# Altium PCB EVAL-CN0349-PMDZ-AltiumDesignerLayout-Rev0.PcbDoc
Units mil, origin at the board's own origin, x right, y up, seen from the top; angles counter-clockwise.
Board outline 2612 x 800 mil, 2 copper layers (Top Layer, Bottom Layer); 49 components, 27 nets, 165 pads, 39 vias.
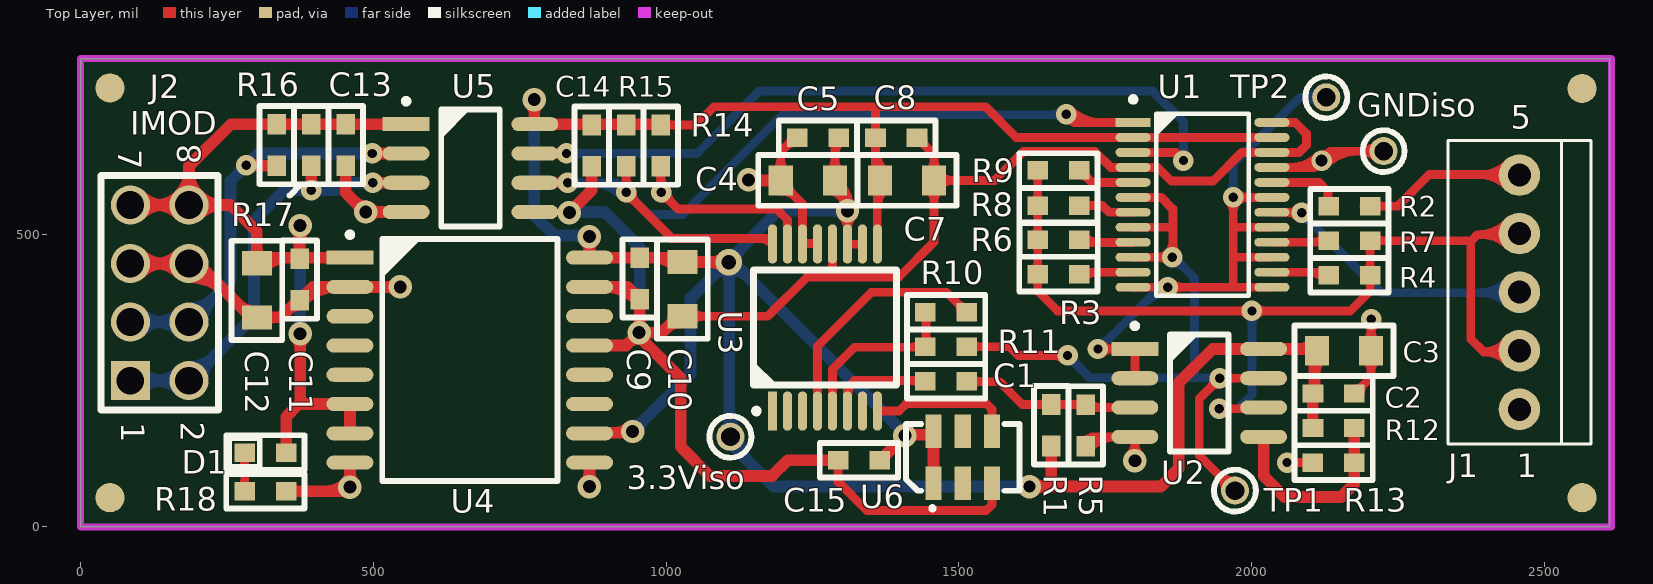
[diagram p0: Top Layer view]
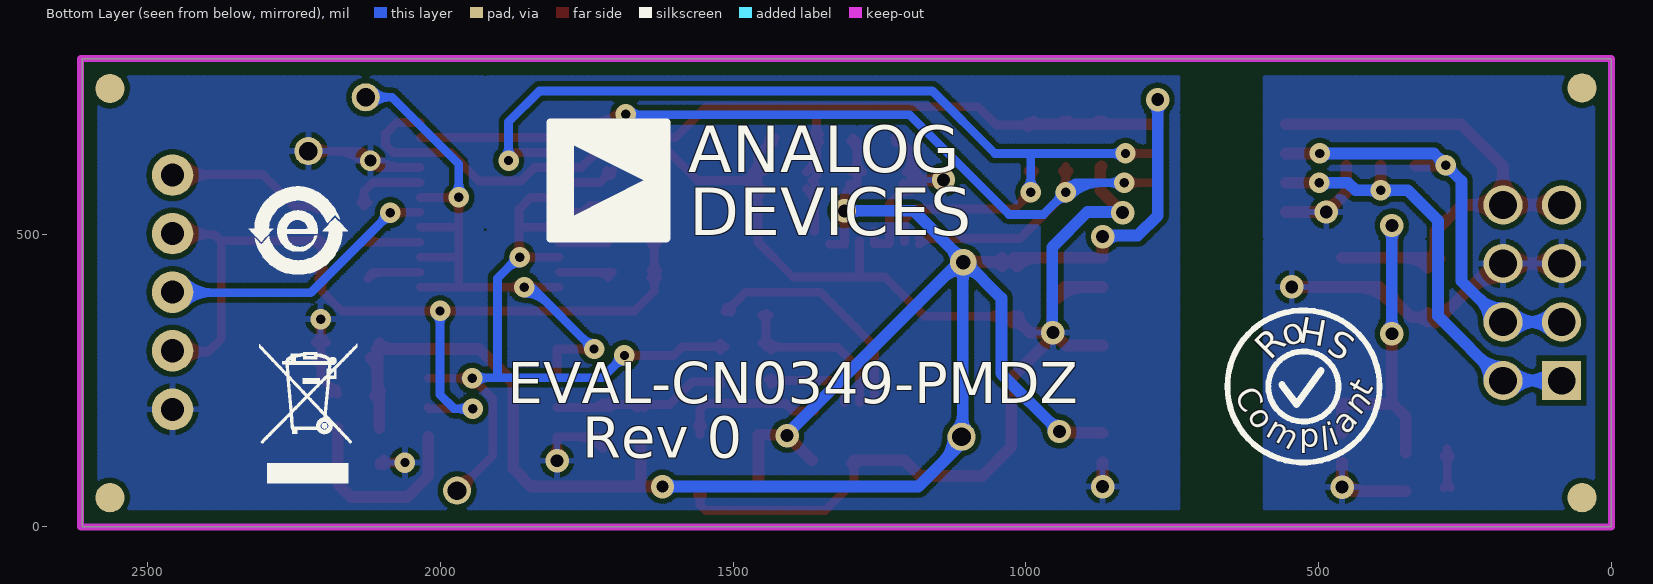
[diagram p1: Bottom Layer view, seen from below]

## Layer stack, top to bottom
Top Layer: signal copper 1.4
Dielectric: dielectric 12.6, FR-4, Dk 4.8
Bottom Layer: signal copper 1.4

## Board outline
0,0 2612,0 2612,800 0,800

## Design rules (kind name [scope] priority, off if disabled: settings)
Clearance [All] p1: gap=9
ComponentClearance [All] p1 off: gap=10 collisioncheckmode=3 verticalgap=10 showdistances=FALSE
PolygonConnect [All] p1: connectstyle=Relief reliefconductorwidth=10 reliefentries=4 polygonreliefangle="90 Angle"
RoutingVias [All] p1: holewidth=16 width=35 viastyle="Through Hole" minholewidth=16 minwidth=35 maxholewidth=60 maxwidth=60
SilkscreenOverComponentPads [All] p1: minsilkscreentomaskgap=10
SolderMaskExpansion [All] p1: expansion=4
Width [All] p1: maxlimit=60 minlimit=10 preferedwidth=20 minimp=50.000000 maximp=50.000000 favimp=50.000000
26 further rules are at their usual default settings.

## Classes and differential pairs
component class CN0349: 3.3Viso C1 C2 C3 C4 C5 C7 C8 C9 C10 C11 C12 C13 C14 C15 D1 GNDiso J1 J2 R1 R2 R3 R4 R5 R6 R7 R8 R9 R10 R11 R12 R13 R14 R15 R16 R17 R18 TP1 TP2 U1 U2 U3 U4 U5 U6

## Components (designator, comment, footprint, x,y, rotation, side; value= is the part's Value field where it differs from the comment)
3.3Viso "TestPoint" TestPoint 1110,154 r0 top
C1 "Cap" "0603 AD" 1443,249 r0 top
C2 "" "0603 AD" 2176,228 r180 top
C3 "" "0805 AD" 2112,301 r0 top
C4 "" "0805 AD" 1196,592 r0 top
C5 "" "0603 AD" 1295,665 r180 top
C7 "" "0805 AD" 1458,592 r180 top
C8 "" "0603 AD" 1358,665 r0 top
C9 "" "0603 AD" 955,460 r270 top
C10 "" "0805 AD" 1028,360 r90 top
C11 "" "0603 AD" 374,458 r270 top
C12 "" "0805 AD" 301,358 r90 top
C13 "Cap" "0603 AD" 453,617 r90 top
C14 "Cap" "0603 AD" 873,616 r90 top
C15 "" "0603 AD" 1365,114 r180 top
D1 "LED3" "0603 Diode" 351,127 r180 top
GNDiso "TestPoint" TestPoint 2226,642 r90 top
J1 "CON5" "Phoenix 5pin 2.54" 2458,201 r90 top
J2 "IMOD_8 PIN" "IMOD Connector" 85,250 r90 top locked
R1 "RESISTOR" "0603 AD" 1658,209 r270 top
R2 "RESISTOR" "0603 AD" 2203,548 r180 top
R3 "RESISTOR" "0603 AD" 1635,432 r0 top
R4 "RESISTOR" "0603 AD" 2203,430 r180 top
R5 "RESISTOR" "0603 AD" 1717,138 r90 top
R6 "RESISTOR" "0603 AD" 1706,491 r180 top
R7 "RESISTOR" "0603 AD" 2203,489 r180 top
R8 "RESISTOR" "0603 AD" 1635,549 r0 top
R9 "RESISTOR" "0603 AD" 1635,609 r0 top
R10 "RESISTOR" "0603 AD" 1443,367 r0 top
R11 "RESISTOR" "0603 AD" 1443,308 r0 top
R12 "RESISTOR" "0603 AD" 2176,169 r180 top
R13 "RESISTOR" "0603 AD" 2105,110 r0 top
R14 "RESISTOR" "0603 AD" 991,616 r90 top
R15 "RESISTOR" "0603 AD" 932,616 r90 top
R16 "RESISTOR" "0603 AD" 335,617 r90 top
R17 "RESISTOR" "0603 AD" 394,617 r90 top
R18 "RESISTOR" "0603 AD" 351,61 r180 top
TP1 "TestPoint" TestPoint 1972,62 r0 top
TP2 "TestPoint" TestPoint 2128,734 r0 top
U1 "" TSSOP24 1798,691 r270 top
U2 "AD8606" SOICN_8 1801,304 r0 top
U3 "AD5934YRSZ" SSOP16 1182,198 r0 top
U4 "" SOICW_16 460,460 r0 top (schematic designator U2)
U5 "ADuM1251" SOICN_8 556,688 r0 top locked
U6 "SMD_OSCILLATOR" Quad6 1457,74.8 r0 top
? "Comment" "ROHS COMPLIANT" 526,240 r180 bottom
? "Comment" "Analog Devices" 1813,492 r180 bottom
? "Comment" "Sign E" 2243,505 r180 bottom
? "Comment" "No Trash" 2228,182 r180 bottom

## Footprints (in the part's own frame and the unit in brackets; to place one, negate y for a bottom-side part, rotate by r counter-clockwise, add the part's x,y. Pads: shape width x height; smd on the part's side, far side on the other; paste and mask are expansions set on the pad)
"0603 AD" [mm]
  rect 0.9x0.8 smd: 1(0,0) 2(1.8,0)
  silkscreen extent -0.8,-0.75 2.6,0.75
"0603 Diode" [mm]
  rect 0.9x0.8 smd: A(0,0) K(1.8,0)
  silkscreen extent -0.8,-0.75 2.6,0.76
"0805 AD" [mm]
  rect 1.05x1.3 smd: 1(0,0) 2(2.35,0)
  silkscreen extent -0.98,-1.1 3.32,1.1
"Analog Devices" [mil]
  silkscreen extent -1,0 201,201
"IMOD Connector" [mm]
  rect 1.7x1.7 hole 1.2: 1(0,0)
  round 1.7 hole 1.2: 2(0,-2.54) 3(2.54,0) 4(2.54,-2.54) 5(5.08,0) 6(5.08,-2.54) 7(7.62,0) 8(7.62,-2.54)
  silkscreen extent -1.27,-3.81 8.89,1.27
"No Trash" [mil]
  silkscreen extent -82,-107 86,130
"Phoenix 5pin 2.54" [mm]
  round 1.8 hole 1: 1(0,0) 2(2.54,0) 3(5.08,0) 4(7.62,0) 5(10.16,0)
  silkscreen extent -1.5,-3.1 11.66,3.1
Quad6 [mm]
  rect 0.7x1.45 smd: 1(0,0) 2(2.54,0) 3(2.54,2.25) 4(0,2.25) ""(1.27,0) ""(1.27,2.25)
  silkscreen extent -1.19,-1.14 3.73,2.57
"ROHS COMPLIANT" [mil]
  silkscreen extent -130,-130 130,130
"Sign E" [mil]
  silkscreen extent -85,-74 84,76
SOICN_8 [mil]
  rect 80x24 smd: 1(0,0)
  oval 80x24 smd: 2(0,-50) 3(0,-100) 4(0,-150) 5(220,-150) 6(220,-100) 7(220,-50) 8(220,0)
  silkscreen extent -3,-175 160,43
SOICW_16 [mil]
  rect 80x24 smd: 1(0,0)
  oval 80x24 smd: 2(0,-50) 4(0,-150) 5(0,-200) 6(0,-250) 7(0,-300) 8(0,-350) 9(409.45,-350) 10(409.45,-300) 11(409.45,-250) 12(409.45,-200) 13(409.45,-150) 14(409.45,-100) 15(409.45,-50) 16(409.45,0)
  oval 80x25 smd: 3(0,-100)
  silkscreen extent -3,-382 354,43
SSOP16 [mm]
  rect 0.4x1.7 smd: 1(0,0)
  oval 0.4x1.7 smd: 2(0.65,0) 3(1.3,0) 4(1.95,0) 5(2.6,0) 6(3.25,0) 7(3.9,0) 8(4.55,0) 9(4.55,7.25) 10(3.9,7.25) 11(3.25,7.25) 12(2.6,7.25) 13(1.95,7.25) 14(1.3,7.25) 15(0.65,7.25) 16(0,7.25)
  silkscreen extent -0.82,-0.08 5.37,6.12
TestPoint [mil]
  round 48 hole 32: 1(0,0)
  silkscreen extent -36,-36 36,36
TSSOP24 [mil]
  rect 15x60 smd: 1(0,0)
  oval 15x60 smd: 2(25.59,0) 3(51.18,0) 4(76.77,0) 5(102.36,0) 6(127.95,0) 7(153.54,0) 8(179.13,0) 9(204.72,0) 10(230.32,0) 11(255.91,0) 12(281.5,0) 13(281.5,237) 14(255.91,237) 15(230.31,237) 16(204.72,237) 17(179.13,237.01) 18(153.54,237.01) 19(127.95,237.01) 20(102.36,237.01) 21(76.77,237.01) 22(51.18,237.01) 23(25.59,237.01) 24(0,237.01)
  silkscreen extent -43,-3 296,197

## Part data
C1 C13 C14: "Capacitor"
C2 C3 C4 C5 C7 C8 C9 C10 C11 C12 C15: library part Cap, "Capacitor"
D1: "LED"
J1: "Connector 5pin"
J2: "IMOD Connector"
R1 R2 R3 R4 R5 R6 R7 R8 R9 R10 R11 R12 R13 R14 R15 R16 R17 R18: "Resistor"
U1: library part ADG715, "Integrated Switch"
U2: "Dual Operational Amplifier"
U3: library part AD5933, "Integrated Circuit"
U4: library part ADuM5000, "Integrated Circuit"
U5: "Integrated Circuit"
U6: "FXO-HC536R-1"

## Free pads (board coordinates)
  round 50 all layers, no hole paste+15 mask+15: ""(50,50) ""(50,750) ""(2565,50) ""(2565,749)

## Via types
v1: diameter 35, hole 16, Top Layer to Bottom Layer, tented both sides, 21 vias
v2: diameter 40, hole 22, Top Layer to Bottom Layer, tented both sides, 12 vias
v3: diameter 40, hole 22, Top Layer to Bottom Layer, 3 vias
v4: diameter 35, hole 20, Top Layer to Bottom Layer, tented both sides, 1 vias
v5: diameter 45, hole 25, Top Layer to Bottom Layer, tented both sides, 1 vias
v6: diameter 40, hole 20, Top Layer to Bottom Layer, tented both sides, 1 vias

## Nets (pads, with @x,y where several pads share a name; then routed paths per layer and width w, separated by ;. In a path a pad name is that pad's centre, name@x,y a point inside that pad or via, vN(x,y) a via of type N, cw(c..) or ccw(c..) an arc to the next point about the centre after c; other vN are vias at no path point)
3.3V: C11.1 C12.2 C13.2 D1.A J2.7 J2.8 R16.2 R17.2 U4.1 U4.6 U4.7 U5.1 | length 2072.7
  Top Layer w20: J2.7 J2.8 ; J2.7@101.59,533.41 cw(c141.65,493.35) 141.65,550 cw(c141.65,606.65) J2.7@101.59,566.59 ; J2.8@168.41,533.41 ccw(c128.35,493.35) 128.35,550 ccw(c128.35,606.65) 168.41,566.59 ccw(c128.35,606.65) 185,606.65 ccw(c241.65,606.65) 201.59,566.59 ccw(c241.65,606.65) 241.65,550 ccw(c241.65,493.35) J2.8@201.59,533.41 ; C12.2@293.46,458.06 ccw(c275.24,476.28) 301,476.28 ccw(c326.76,476.28) C12.2@308.54,458.06 ; C12.2@301,458 301,505 256,550 J2.8 ; C12.2@301,460 C11.1@374,460 ; C12.2@313.47,442.98 cw(c354.57,401.87) 354.57,460 ; D1.A 351,188 373,210 375,210 ; v2@367.93,322.93 cw(c350.86,305.86) 375,305.86 cw(c399.14,305.86) v2@382.07,322.93 ; v3@367.93,507.93 cw(c353.27,493.27) 374,493.27 ; C11.1 C11.1@374,460 ; 374,488.44 cw(c401.56,488.44) v3@382.07,507.93 ; v2(375,330) 375,210 ; v3@375,505 374,504 C11.1@374,460 ; U4.7 U4.6 375,210 ; U4.1 C11.1@374,460 ; U5.1 335.13,688 R16.2 256.87,687.87 185,616 J2.8
  Bottom Layer w20: v2@367.93,337.07 ccw(c350.86,354.14) 375,354.14 ccw(c399.14,354.14) v2@382.07,337.07 ; v3@367.93,507.93 cw(c350.86,490.86) 375,490.86 cw(c399.14,490.86) v3@382.07,507.93 ; v2(375,330) v3@375,505
  other v3: 375,515
3.3VISO: 3.3Viso.1 C2.2 C3.1 C4.2 C5.1 C7.2 C8.1 C9.1 C10.2 C14.2 C15.1 R1.2 R12.2 R14.2 R15.2 U1.2 U1.23 U2.8 U3.9 U3.10 U3.11 U4.10 U4.16 U5.8 U6.1 U6.4 | length 6786.4
  Top Layer w15: R14.2 1050.87,686.87 1082,718 1360,718 ; R14.2@996.83,681.03 cw(c1010.91,666.95) 1010.91,686.87 cw(c1010.91,706.78) R14.2@996.83,692.7 ; C4.2@1279.21,606.23 ccw(c1256.73,628.71) 1288.52,628.71 ccw(c1320.31,628.71) C4.2@1297.83,606.23 ; C4.2@1283.5,574.9 cw(c1267.21,535.33) v2@1310,535.33 ; 1288.52,634.2 cw(c1323.84,634.2) C5.1@1298.86,659.17 ; C4.2@1288.64,573.91 cw(c1288.91,544.51) 1309.7,565.3 cw(c1329.19,584.79) C4.2@1301.67,586.34 ; C4.2@1289.22,588.77 cw(c1276.43,557.73) v2@1310,557.73 ; C5.1 1288.52,658.52 C4.2 1288.52,586.48 1310,565 ; C4.2@1299.12,575.88 cw(c1266.53,543.28) v2@1312.49,539.81 ; v2@1301.16,531.16 cw(c1279.82,509.82) 1310,509.82 cw(c1340.18,509.82) v2@1318.84,531.16 ; v2@1302.5,550 ccw(c1291.25,565) 1310,565 ; v2@1317.5,550 cw(c1328.75,565) 1310,565 ; U3.10@1335.54,483 1310,483 1310,539.23 1310.39,539.61 v2(1310,540) 1310,565 ; C8.1@1352.17,659.17 cw(c1338.09,645.09) 1358,645.09 cw(c1377.91,645.09) C8.1@1363.83,659.17 ; C8.1@1352.17,670.83 ccw(c1338.09,684.91) 1358,684.91 ccw(c1377.91,684.91) C8.1@1363.83,670.83 ; C7.2@1356.17,577.77 cw(c1344.5,566.1) 1361,566.1 ; 1358,646.77 ccw(c1415.33,646.77) C7.2@1374.79,606.23 ; 1361,544.47 cw(c1408.09,544.47) C7.2@1374.79,577.77 ; U3.9@1361.57,504.78 1361,505.35 1361,587.52 C7.2 1358,599.48 C8.1 1358,716 1360,718 ; U1.23 U1.2 1598.59,665.41 1546,718 1360,718
  Top Layer w20: v2@767.93,722.93 cw(c750.86,705.86) 775,705.86 cw(c799.14,705.86) v2@782.07,722.93 ; v2(775,730) 775,689 U5.8 R14.2@989,688 ; 857.11,688 ccw(c857.11,704.73) C14.2@868.94,692.9 ; v2@861.93,488.93 cw(c843.77,470.77) U4.16@869.45,470.77 ; U4.10 870.45,161 941,161 v2(943,163) ; 869.45,472.94 cw(c892.06,472.94) v2@876.07,488.93 ; v2@871,496 869.45,494.45 U4.16 C9.1 1020.52,460 C10.2 1106.48,452.52 v5(1107,452) ; C14.2@877.06,692.9 ccw(c888.89,704.73) 888.89,688 ; 914.03,161 ccw(c914.03,191.97) v2@935.93,170.07 ; 916.11,688 ccw(c916.11,704.73) R15.2@927.94,692.9 ; R15.2@936.06,692.9 ccw(c947.89,704.73) 947.89,688 ; 975.11,688 ccw(c975.11,704.73) R14.2@986.94,692.9 ; 979.26,460 cw(c979.26,408.7) C10.2@1015.53,444.98 ; C10.2@1040.47,444.98 cw(c1058.68,426.76) 1058.68,452.52 cw(c1058.68,478.28) C10.2@1040.47,460.06 ; 1075.57,452.52 cw(c1075.57,420.57) v5@1098.16,443.16 ; 1078.08,452.52 ccw(c1078.08,480.92) v5@1098.16,460.84 ; C15.1 1366,114 v2(1408,156) 1408,157.58 1457,157.58 U6.1@1457,69 ; v6(1621,69) 1845,69 1876,100 1876,246 1934,304 U2.8 2109,304 2108,303 2108,227.33 C2.2@2112,223.33 ; v6@1628.07,61.93 cw(c1645.14,44.86) 1645.14,69 cw(c1645.14,93.14) v6@1628.07,76.07 ; 1658,69.42 R1.2@1658,137.13 ; 2081.6,304 ccw(c2081.6,336.32) C3.1@2104.46,313.47 ; 2090.88,304 cw(c2090.88,284.8) C3.1@2104.46,298.38 ; C2.2@2103.04,232.06 ccw(c2091.06,244.04) 2108,244.04 ; R12.2 C2.2 ; 2108,260.66 cw(c2147.41,260.66) C3.1@2119.54,288.53
  Bottom Layer w20: v2@767.93,722.93 cw(c750.86,705.86) 775,705.86 cw(c799.14,705.86) v2@782.07,722.93 ; v2@775,731 v2(775,730) 775,532 809,498 867,498 v2(869,496) ; 840.03,498 cw(c840.03,467.03) v2@861.93,488.93 ; v2(943,163) 1042,262 1042,391 1103,452 v5(1107,452) ; v2@943,173 ccw(c943,197.14) 960.07,180.07 ccw(c977.14,163) v2@953,163 ; 1078.83,427.83 cw(c1107,399.67) 1107,439.5 cw(c1107,390.01) 1142,425 ; 1088.49,437.49 ccw(c1073.98,452) v5@1094.5,452 ; v5@1098.16,443.16 cw(c1074.41,419.41) 1108,419.41 ; 3.3Viso.1@1100.1,163.9 ccw(c1081.03,182.97) 1108,182.97 ; v5@1107,464.5 ccw(c1107,487.43) 1123.22,471.22 ; 1108,192.63 ccw(c1148.63,192.63) 3.3Viso.1@1119.9,163.9 ; 1108,424.24 cw(c1134.76,424.24) v5@1115.84,443.16 ; v5@1119.5,452 cw(c1156.92,452) 1130.46,478.46 ; 3.3Viso.1@1124,154 ccw(c1184.36,154) 1141.68,111.32 ; v2@1302.93,532.93 ccw(c1285.86,515.86) 1285.86,540 ccw(c1285.86,564.14) v2@1302.93,547.07 ; v2@1309,540 1192,540 1107,455 v5(1107,452) ; v2@1408,159 1116,451 v5@1108,451 ; v6@1613.93,61.93 ccw(c1596.86,44.86) 1596.86,69 ccw(c1596.86,93.14) v6@1613.93,76.07 ; v6(1621,69) 1184,69 1108,145 v5@1108,451 ; v5(1107,452) 1109,452 v5@1108,451
DGNDISO: C2.1 C3.2 C4.1 C5.2 C7.1 C8.2 C9.2 C10.1 C14.1 C15.2 GNDiso.1 J1.1 R5.1 R13.1 U1.4 U1.21 U1.22 U1.24 U2.4 U3.12 U3.13 U3.14 U4.9 U4.13 U4.15 U5.5 U6.2 | length 5185
  Top Layer w15: C10.1@1021,360 1174,360 ; C10.1@1042.23,350.69 cw(c1064.71,328.21) 1064.71,360 cw(c1064.71,391.79) C10.1@1042.23,369.31 ; v2(1141,593) v2@1142,592 ; 1175.5,361.5 1241,427 1398,427 1458,487 C7.1 ; C4.1@1186.69,606.23 ccw(c1164.21,628.71) 1196,628.71 ccw(c1227.79,628.71) C4.1@1205.31,606.23 ; C4.1@1196,573.91 cw(c1196,537.48) 1221.76,563.24 ; 1204.39,649.39 cw(c1222.17,631.61) C5.2@1222.17,656.75 ; C4.1@1209.17,587.08 ccw(c1236.32,587.08) 1217.12,567.88 ; C5.2@1209.62,654.62 ccw(c1199.23,665) C5.2@1213.92,665 ; C5.2 1220,665 1196,641 C4.1 1196,589 1233,552 1233,484 1259.2,484 U3.13@1259.2,504.78 ; 1284.36,428 U3.12 U3.12@1284.36,487.56 ; C15.2@1288.3,108.17 cw(c1274.54,94.41) 1294,94.41 ; 1294,93.76 cw(c1314.37,93.76) C15.2@1299.97,108.17 ; C15.2@1294,113.87 1294,77 1343,28 1547,28 1557,38 U6.2@1557,69 ; C8.2 1458,635.87 C7.1 ; C8.2@1430.83,656.75 cw(c1430.83,641.59) C8.2@1441.55,652.31 ; C8.2@1439.08,665 ccw(c1463.75,665) 1446.31,647.56 ; C7.1@1448.69,577.77 cw(c1426.21,555.29) 1458,555.29 cw(c1489.79,555.29) C7.1@1467.31,577.77 ; C7.1@1448.69,606.23 ccw(c1426.21,628.71) 1458,628.71 ccw(c1489.79,628.71) C7.1@1467.31,606.23 ; C7.1@1467.31,582.69 cw(c1489.79,560.21) 1489.79,592 cw(c1489.79,623.79) C7.1@1467.31,601.31 ; U6.2@1552.56,53.93 cw(c1541.84,43.21) 1557,43.21 cw(c1572.16,43.21) U6.2@1561.44,53.93 ; R5.1@1712,138 1728,154 U2.4 v2(1801,113) ; R5.1@1712.23,144.74 cw(c1734.57,122.39) 1734.57,154 ; R5.1@1722.83,134.14 cw(c1770.79,86.18) U2.4@1770.79,154 ; v2@1792.16,121.84 ccw(c1770.82,143.18) 1801,143.18 ccw(c1831.18,143.18) v2@1809.84,121.84 ; U1.21 2107.23,614.23 2135,642 GNDiso.1 ; U1.24 2075,691 2094,672 2094,652 2081.82,639.82 U1.22 1983.82,639.82 1935,591 1863,591 1839.77,614.23 U1.4 1759.77,614.23 1732.75,641.25 1610.45,641.25 1561.2,592 C7.1 ; v1(2061,110) R13.1 R13.1@2105,104.38 ; 2067.44,614.23 ccw(c2067.44,678.56) v4@2112.93,633.07 ; v1@2068.07,102.93 cw(c2085.14,85.86) 2085.14,110 cw(c2085.14,134.14) v1@2068.07,117.07 ; R13.1@2097.2,104.17 ccw(c2083.12,90.09) 2083.12,110 ccw(c2083.12,129.91) R13.1@2097.2,115.83 ; 2103.65,614.23 ccw(c2103.65,642.35) v4@2123.54,622.46 ; v4@2116.46,629.54 cw(c2146.56,599.44) 2146.56,642 ; v4@2127.07,618.93 cw(c2182.77,563.23) 2182.77,642 ; C2.1@2176,227 2204.52,255.52 C3.2 v1@2204.52,346.52 ; C2.1@2177.97,236.25 ccw(c2177.97,253.82) C2.1@2190.4,241.4 ; C2.1@2186.22,228 cw(c2208.47,228) C2.1@2192.73,243.73 ; C3.2@2195.21,286.77 cw(c2172.73,264.29) 2204.52,264.29 cw(c2236.31,264.29) C3.2@2213.83,286.77 ; C3.2@2195.21,315.23 ccw(c2172.73,337.71) 2204.52,337.71 ccw(c2236.31,337.71) C3.2@2213.83,315.23 ; v1@2197.93,347.93 cw(c2182.02,332.02) 2204.52,332.02 ; 2204.52,329.7 cw(c2230.3,329.7) v1@2212.07,347.93 ; GNDiso.1@2214.33,630.33 ccw(c2186.17,602.17) 2186.17,642 ccw(c2186.17,681.83) GNDiso.1@2214.33,653.67
  Top Layer w20: v2@845,547 873,575 873,614 C14.1@871,616 ; v2@861.93,76.07 ccw(c843.77,94.23) 869.45,94.23 ; v2@869.45,72.45 U4.9 ; 869.45,92.06 ccw(c892.06,92.06) v2@876.07,76.07 ; U4.13 932,310 ; U4.15 934.13,410 C9.2 v2@955,333 ; U4.15@895.5,410 cw(c895.5,331.6) C9.2@950.94,387.04 ; 936.93,314.93 cw(c954,297.86) v2@954,322 ; C9.2@941.83,402.31 ccw(c955,415.48) C9.2@955,396.85 ; v2@954,325 1025,254 1025,137 1075,87 1181,87 1208,114 C15.2 C15.2@1294,113.87 ; v2(954,332) 993,332 C10.1@1021,360 ; 1001.32,340.32 cw(c1023.08,318.55) C10.1@1023.08,349.33 ; C10.1@1006.34,345.34 ccw(c991.67,360) C10.1@1012.41,360 ; v2@1142,592 C4.1 ; v2@1148.07,585.93 cw(c1162.73,571.27) 1162.73,592 ; v2@1148.07,600.07 ccw(c1167.56,619.56) 1167.56,592 ; C4.1@1188.46,584.46 ccw(c1170.24,566.24) 1170.24,592 ccw(c1170.24,617.76) C4.1@1188.46,599.54
  Bottom Layer w20: v2@848,538 895,538 955,478 v2@955,332
  other v1: 2205,355
  other v2: 869,69 835,537
  other v4: 2120,626
GND: C11.2 C12.1 C13.1 J2.5 J2.6 R18.1 U4.2 U4.8 U5.4 | length 1492.7
  Top Layer w20: J2.5 J2.6 200,450 C12.1@301,349 ; J2.5@101.59,433.41 cw(c141.65,393.35) 141.65,450 cw(c141.65,506.65) J2.5@101.59,466.59 ; J2.6@168.41,433.41 ccw(c128.35,393.35) 128.35,450 ccw(c128.35,506.65) J2.6@168.41,466.59 ; J2.6@185,426.54 cw(c185,333.67) 250.66,399.34 ; J2.6@185,446.54 cw(c185,401.96) 216.52,433.48 ; 270.9,379.1 ccw(c296.08,404.27) C12.1@296.08,368.67 ; C12.1 342,358 372.5,388.5 C11.2@372.5,391.5 ; C12.1@313.47,350.46 cw(c331.68,332.24) 331.68,358 cw(c331.68,383.76) C12.1@313.47,365.54 ; R18.1 452,61 v3@460,69 ; 355.93,371.93 cw(c374,353.87) C11.2@374,379.42 ; C11.2 396.87,410 U4.2@462.13,410 ; C11.2@374,394.85 ccw(c374,413.48) C11.2@387.17,400.31 ; C11.2@378.06,385.04 cw(c438.33,324.77) U4.2@438.33,410 ; 418.96,61 ccw(c418.96,109.04) 452.93,75.07 ccw(c435.86,92.14) 460,92.14 ccw(c484.14,92.14) v3@467.07,75.07 ; C13.1 453,571 483,541 v2@483,533 ; v3(460,68) U4.8 ; U4.2 v3(546,410) ; 468.22,555.78 ccw(c487,574.56) v2@487,548 ; 470.64,553.36 cw(c455.27,538) v2@477,538 ; v2@488,538 U5.4 ; v2@494.07,530.93 cw(c511.14,513.86) 511.14,538 cw(c511.14,562.14) v2@494.07,545.07 ; v3@538.93,402.93 ccw(c521.86,385.86) 521.86,410 ccw(c521.86,434.14) v3@538.93,417.07
  other v2: 487,538
MCLK: U3.8 U6.3 | length 272.6
  Top Layer w15: U3.8 1398,198 1411,211 1547,211 1557,201 U6.3@1557,157.58 ; U6.3@1552.56,172.65 ccw(c1541.84,183.37) 1557,183.37 ccw(c1572.16,183.37) U6.3@1561.44,172.65
NetC1_1: C1.1 U3.6 | length 221
  Top Layer w15: U3.6@1309.95,212 1309.95,237.95 1322,250 1438,250 C1.1@1440,252 ; U3.6@1310.33,223.59 cw(c1345.9,223.59) 1320.75,248.75 ; 1418.7,250 cw(c1418.7,226.67) C1.1@1435.2,243.17 ; 1423.53,250 ccw(c1423.53,266.5) C1.1@1435.2,254.83
NetC1_2: C1.2 R1.1 R5.2 U2.3 | length 436.9
  Top Layer w15: C1.2@1521.67,243.17 cw(c1533.33,231.5) 1533.33,248 ; C1.2@1521.67,254.83 ccw(c1538.16,271.33) 1538.16,248 ; C1.2@1530.87,248 1570,248 1609,209 1711.87,209 1716.87,204 U2.3 ; R1.1@1652.17,203.17 ccw(c1638.09,189.09) 1638.09,209 ccw(c1638.09,228.91) R1.1@1652.17,214.83 ; R1.1@1663.83,203.17 cw(c1677.91,189.09) 1677.91,209 cw(c1677.91,228.91) R1.1@1663.83,214.83 ; 1696.76,209 cw(c1696.76,188.63) R5.2@1711.17,203.03 ; 1697.41,209 ccw(c1697.41,228.46) R5.2@1711.17,214.7 ; R5.2@1722.83,212.73 ccw(c1743.91,233.81) 1743.91,204
NetD1_K: D1.K R18.2 | length 126.6
  Top Layer w15: R18.2@274.3,66.83 ccw(c260.22,80.91) 280.13,80.91 ccw(c300.05,80.91) R18.2@285.97,66.83 ; D1.K@274.3,121.17 cw(c260.22,107.09) 280.13,107.09 cw(c300.05,107.09) D1.K@285.97,121.17 ; R18.2@280.13,70 D1.K@280.13,134
NetR2_2: R2.2 U1.20 | length 158.7
  Top Layer w15: U1.20 2115.36,588.64 2131,573 R2.2@2131,548 ; R2.2@2124.33,553.83 ccw(c2108.24,569.93) 2131,569.93 ; 2131,565.9 ccw(c2148.06,565.9) R2.2@2136,553.83
NetR3_2: R3.2 U1.11 | length 114.7
  Top Layer w15: R3.2@1705.87,435 U1.11@1796.87,435 ; R3.2@1713.67,426.17 cw(c1734.99,404.84) 1734.99,435
NetR4_2: R4.2 U1.14 | length 117.5
  Top Layer w15: U1.14 2116.04,435.09 R4.2@2121.13,430 ; 2097.95,435.09 cw(c2097.95,397.79) R4.2@2124.33,424.17
NetR6_1: R6.1 U1.9 | length 112.5
  Top Layer w15: R6.1@1713.8,496.83 ccw(c1740.28,523.31) 1740.28,485.87 ; R6.1@1714.87,485.87 U1.9@1798,485.87
NetR7_2: R7.2 U1.16 | length 126.2
  Top Layer w15: U1.16 R7.2@2134,486.28 ; 2103.68,486.28 ccw(c2103.68,515.49) R7.2@2124.33,494.83 ; R7.2@2118.13,486 R7.2@2121.13,489
NetR8_2: R8.2 U1.7 | length 128.2
  Top Layer w15: R8.2 1745.46,549 1757,537.46 U1.7 ; R8.2@1713.67,543.17 cw(c1727.75,529.09) 1727.75,549 cw(c1727.75,568.91) R8.2@1713.67,554.83
NetR9_2: R9.2 U1.5 | length 131.8
  Top Layer w15: R9.2 1714.87,600 1716,600 1727.36,588.64 U1.5 ; R9.2@1707.83,600.75 cw(c1707.83,582.85) R9.2@1720.49,595.51 ; R9.2@1716.08,609 ccw(c1738.01,609) R9.2@1722.5,593.5
NetR10_1: R10.1 R11.1 U3.5 | length 384.4
  Top Layer w15: U3.5@1284.36,212 1284.36,269.36 1322,307 1444,307 R10.1@1444,365 ; 1418.7,307 ccw(c1418.7,330.33) R11.1@1435.2,313.83 ; 1423.53,307 cw(c1423.53,290.5) R11.1@1435.2,302.17 ; R11.1@1439.14,313.83 ccw(c1427.39,325.57) 1444,325.57 ; R10.1@1439.14,361.17 cw(c1427.39,349.43) 1444,349.43 ; 1444,330.25 ccw(c1467.22,330.25) R11.1@1450.8,313.83 ; 1444,344.75 cw(c1467.22,344.75) R10.1@1450.8,361.17
NetR10_2: R10.2 U3.4 | length 432.1
  Top Layer w15: U3.4@1258.77,215 1258.77,308.77 1351,401 1479.25,401 1512.25,368 R10.2@1514,368 ; 1496.86,383.39 cw(c1480.48,367) R10.2@1503.65,367 ; R10.2@1500.12,380.13 ccw(c1511.9,391.9) R10.2@1511.9,375.25
NetR11_2: R11.2 TP1.1 U1.6 U1.8 U1.10 U2.7 | length 1715.6
  Top Layer w15: R11.2 1587,308 1602,293 1661.86,293 ; R11.2@1521.67,302.17 cw(c1535.75,288.09) 1535.75,308 cw(c1535.75,327.91) R11.2@1521.67,313.83 ; U1.10 1864.69,460.68 v1(1865,461) 1866,462 1866,513 ; U1.8 1864.87,511.87 1866,513 ; U1.6 1845.95,563.05 1866,543 1866,513 ; 1840.1,460.68 ccw(c1840.1,485.9) 1857.93,468.07 ccw(c1838.44,487.56) 1866,487.56 ; 1841.62,460.68 cw(c1841.62,437.62) v1@1857.93,453.93 ; 1866,482.73 ccw(c1886.73,482.73) v1@1872.07,468.07 ; v1@1936,254 cw(c1911.86,254) 1928.93,236.93 cw(c1946,219.86) v1@1946,244 ; 1942.13,90.87 ccw(c1972,120.75) TP1.1@1972,78.5 ; 1944.54,88.46 cw(c1918.08,62) TP1.1@1955.5,62 ; v1@1953.07,246.93 cw(c1970.14,229.86) 1970.14,254 cw(c1970.14,278.14) v1@1953.07,261.07 ; v1@1957,253 v1(1946,254) ; TP1.1@1973,60 1911,122 1911,219 v1(1946,254) ; U2.7 v1(1946,254) ; 1661.86,293 cw(c1661.86,268.86) 1678.93,285.93 ccw(c1661.86,268.86) 1661.86,293 ; 1661.86,293 ccw(c1661.86,317.14) 1678.93,300.07 cw(c1661.86,317.14) 1661.86,293
  Bottom Layer w15: v1@1686,283 cw(c1686,258.86) 1703.07,275.93 cw(c1720.14,293) v1@1696,293 ; v1(1686,293) 1724,255 1954,255 1956,253 1957,254 v1@1957,253 ; v1@1865,451 cw(c1865,422.03) 1885.49,442.51 ; v1@1865,463 1903,425 1903,256 ; v1@1875,461 ccw(c1894.31,461) 1880.66,447.34 ; 1919.44,255 cw(c1919.44,227.44) v1@1938.93,246.93 ; 1924.27,255 ccw(c1924.27,275.73) v1@1938.93,261.07
NetR12_1: R12.1 R13.2 U2.5 | length 341.6
  Top Layer w20: U2.5 2021,87 2057,51 2153,51 2176,74 R13.2@2176,110.13 ; R13.2 R13.2@2176,110.13 ; R12.1 R13.2@2176,110.13
NetTP2_1: TP2.1 U1.12 U1.13 U1.15 U1.17 U1.19 U2.1 U2.2 | length 1491.8
  Top Layer w15: v1@1745.07,296.93 cw(c1762.14,279.86) 1762.14,304 cw(c1762.14,328.14) v1@1745.07,311.07 ; v1@1749,304 U2.1 U2.2 ; U1.12 v1(1857,409.5) 1969,409.5 ; v1@1849.93,402.43 ccw(c1832.86,385.36) 1832.86,409.5 ccw(c1832.86,433.65) v1@1849.93,416.57 ; v1@1864.07,402.43 cw(c1881.14,385.36) 1881.14,409.5 cw(c1881.14,433.65) v1@1864.07,416.57 ; v1@1961.93,555.98 cw(c1944.86,538.91) 1969,538.91 cw(c1993.14,538.91) 1976.07,555.98 cw(c1993.14,538.91) 1993.14,563.05 cw(c1993.14,587.19) v1@1976.07,570.12 ; 1970,460 1969,459 ; U1.13 1969,409.5 ; U1.15 1970.69,460.68 1969,459 ; U1.17 1971.87,511.87 1969,509 ; U1.19 v1(1969,563.05) 1969,509 ; 1969,409.5 1969,459 ; 1969,459 1969,509
  Bottom Layer w15: v1(1738,304) 1738,303 1844.5,409.5 v1(1857,409.5) ; v1@1738,314 ccw(c1738,340.56) 1756.78,321.78 ; v1@1748,304 cw(c1769.73,304) 1754.36,319.36 ; 1818.6,383.6 cw(c1857,345.19) v1@1857,399.5 ; v1@1961.93,570.12 ccw(c1944.86,587.19) 1969,587.19 ccw(c1993.14,587.19) v1@1976.07,570.12 ; v1(1969,563.05) 1969,620 2083,734 TP2.1 ; TP2.1@2116.33,722.33 ccw(c2088.17,694.17) 2088.17,734 ccw(c2088.17,773.83) TP2.1@2116.33,745.67
PT100-1: J1.3 U1.18 | length 666.4
  Top Layer w15: U1.18 2085.54,537.46 v1(2086,537) ; U1.18@2060.76,537.46 cw(c2060.76,511.76) v1@2078.93,529.93 ; U1.18@2062.96,537.46 ccw(c2062.96,560.04) v1@2078.93,544.07
  Bottom Layer w15: v1@2086,527 cw(c2086,505.27) 2101.36,520.64 ; v1(2086,537) 2086,536 2222,400 2431,400 J1.3@2453,378 ; v1@2096,537 ccw(c2122.56,537) 2103.78,518.22 ; 2388.15,400 ccw(c2388.15,470.85) J1.3@2438.25,420.75 ; 2392.98,400 cw(c2392.98,335.98) J1.3@2438.25,381.25
PT100-2: J1.2 J1.4 R3.1 R4.1 R6.2 R7.1 R8.1 R9.1 U2.6 | length 2467
  Top Layer w15: R3.1@1629.17,426.17 cw(c1615.09,412.09) 1635,412.09 cw(c1654.91,412.09) R3.1@1640.83,426.17 ; R3.1@1629.17,437.83 ccw(c1615.09,451.91) 1635,451.91 ccw(c1654.91,451.91) R3.1@1640.83,437.83 ; R8.1@1629.17,543.17 cw(c1615.09,529.09) 1635,529.09 cw(c1654.91,529.09) R8.1@1640.83,543.17 ; R8.1@1629.17,554.83 ccw(c1615.09,568.91) 1635,568.91 ccw(c1654.91,568.91) R8.1@1640.83,554.83 ; R9.1@1629.17,603.17 cw(c1615.09,589.09) 1635,589.09 cw(c1654.91,589.09) R9.1@1640.83,603.17 ; R6.2@1629.3,485.17 cw(c1615.54,471.41) 1635,471.41 ; R6.2@1629.3,496.83 ccw(c1615.54,510.59) 1635,510.59 ; 1635,470.76 cw(c1655.37,470.76) R6.2@1640.97,485.17 ; 1635,511.24 ccw(c1655.37,511.24) R6.2@1640.97,496.83 ; R9.1 R8.1 R3.1 1635,403 1669,369 v1(2001,369) 2169,369 2203,403 R4.1 R7.1 2376,489 2386,499 ; v1(1945,202) 2019,202 U2.6 ; v1@1952.07,194.93 cw(c1969.14,177.86) 1969.14,202 cw(c1969.14,226.14) v1@1952.07,209.07 ; 1977.31,202 ccw(c1977.31,219.69) U2.6@1989.82,207.18 ; v1@1993.93,361.93 ccw(c1976.86,344.86) 1976.86,369 ccw(c1976.86,393.14) v1@1993.93,376.07 ; v1@2008.07,361.93 cw(c2025.14,344.86) 2025.14,369 cw(c2025.14,393.14) v1@2008.07,376.07 ; R4.1@2197.17,424.17 cw(c2183.09,410.09) 2203,410.09 cw(c2222.91,410.09) R4.1@2208.83,424.17 ; R4.1@2197.17,435.83 ccw(c2183.09,449.91) 2203,449.91 ccw(c2222.91,449.91) R4.1@2208.83,435.83 ; R7.1@2197.17,483.17 cw(c2183.09,469.09) 2203,469.09 cw(c2222.91,469.09) R7.1@2208.83,483.17 ; R7.1@2210.8,483.17 cw(c2224.88,469.09) 2224.88,489 cw(c2224.88,508.91) R7.1@2210.8,494.83 ; 2375,489 2375,321 2397,299 ; 2395.39,499 cw(c2395.39,438.39) J1.4@2438.25,481.25 ; 2422.08,499 ccw(c2422.08,536.73) J1.4@2448.83,510.12 ; J1.2@2435.91,318.09 cw(c2397,348.18) 2397,299 ; J1.2@2437.88,281.62 ccw(c2397,242.23) 2397,299 ; J1.4@2438.2,520.7 cw(c2386,572.62) 2386,499 ; J1.2@2453,278 2432,299 2397,299 ; J1.4@2453,478 2432,499 2386,499
  Bottom Layer w15: v1@1952,202 1977,202 2001,226 v1(2001,369) ; v1@1952.07,194.93 cw(c1969.14,177.86) 1969.14,202 cw(c1969.14,226.14) v1@1952.07,209.07 ; v1@1993.93,361.93 cw(c1976.86,344.86) 2001,344.86 cw(c2025.14,344.86) v1@2008.07,361.93
SCL: J2.1 J2.2 R17.1 U5.3 | length 1157.6
  Top Layer w20: v1@388.7,580.3 ccw(c375.89,593.11) 394,593.11 ccw(c412.11,593.11) v1@399.3,580.3 ; v1(394,575) R17.1 ; v1(499,588) U5.3 ; v1@504.3,582.7 cw(c517.11,569.89) 517.11,588 cw(c517.11,606.11) v1@504.3,593.3
  Bottom Layer w20: J2.1 J2.2 186,250 296,360 296,523 348,575 v1(394,575) 437,575 450,588 v1(499,588) ; J2.1@101.59,233.41 cw(c141.65,193.35) 141.65,250 cw(c141.65,306.65) J2.1@101.59,266.59 ; J2.2@168.41,233.41 ccw(c128.35,193.35) 128.35,250 ccw(c128.35,306.65) J2.2@168.41,266.59 ; J2.2@185,273.46 ccw(c185,332.53) 226.76,290.76 ; J2.2@208.46,250 cw(c262.7,250) 224.35,288.35 ; v1@388.7,569.7 ccw(c375.89,556.89) 375.89,575 ccw(c375.89,593.11) v1@388.7,580.3 ; v1@399.3,569.7 cw(c412.11,556.89) 412.11,575 cw(c412.11,593.11) v1@399.3,580.3 ; v1@493.7,582.7 ccw(c480.89,569.89) 480.89,588 ccw(c480.89,606.11) v1@493.7,593.3
SCLISO: R15.1 U1.1 U3.16 U5.6 | length 1910.9
  Top Layer w15: U5.6 v1@829,588 ; v1@824.93,580.93 ccw(c807.86,563.86) 807.86,588 ccw(c807.86,612.14) v1@824.93,595.07 ; v1@924.93,579.07 ccw(c907.86,596.14) 932,596.14 ccw(c956.14,596.14) v1@939.07,579.07 ; R15.1@926.17,608.2 cw(c912.09,594.12) 932,594.12 cw(c951.91,594.12) R15.1@937.83,608.2 ; v1@932,562 cw(c932,540.27) 947.36,555.64 ; v1@932,571 1010,493 U3.16@1182,493 ; v1(932,572) R15.1 ; v1@942,572 ccw(c968.56,572) 949.78,553.22 ; 1158,493 cw(c1158,459.43) U3.16@1181.74,483.17 ; v1@1680.46,701.46 ccw(c1705.73,726.73) 1705.73,691 ; v1(1684,705) 1698,691 U1.1 ; v1@1691.07,712.07 ccw(c1741.94,762.94) 1741.94,691
  Bottom Layer w15: v1@829,588 916,588 v1(932,572) 970,534 1029,534 1199,704 v1@1683,704 ; v1@839.07,580.93 cw(c856.14,563.86) 856.14,588 cw(c856.14,612.14) v1@839.07,595.07 ; 869.23,588 cw(c869.23,509.23) v1@924.93,564.93 ; 905.44,588 cw(c905.44,545.44) v1@935.54,575.54 ; v1@932,562 cw(c932,537.86) 949.07,554.93 cw(c966.14,572) v1@942,572 ; 1657.44,704 ccw(c1657.44,731.56) v1@1676.93,712.07 ; 1662.27,704 cw(c1662.27,683.27) v1@1676.93,697.93
  other v1: 832,588
SDA: J2.3 J2.4 R16.1 U5.2 | length 1140.5
  Top Layer w20: v1(283,618) 284,617 R16.1 ; v1@288.3,623.3 ccw(c303.52,638.52) 303.52,617 ; v1(498,638) U5.2 ; v1@503.3,632.7 cw(c516.11,619.89) 516.11,638 cw(c516.11,656.11) v1@503.3,643.3
  Bottom Layer w20: J2.3 J2.4 186,350 256,420 256,591 v1(283,618) 303,638 v1(498,638) ; J2.3@101.59,333.41 cw(c141.65,293.35) 141.65,350 cw(c141.65,406.65) J2.3@101.59,366.59 ; J2.4@168.41,333.41 ccw(c128.35,293.35) 128.35,350 ccw(c128.35,406.65) J2.4@168.41,366.59 ; J2.4@185,373.46 ccw(c185,432.53) 226.76,390.76 ; J2.4@208.46,350 cw(c262.7,350) 224.35,388.35 ; v1@275.5,618 cw(c257.39,618) 270.2,605.2 cw(c283,592.39) v1@283,610.5 ; v1@283,625.5 ccw(c283,643.61) 295.8,630.8 ccw(c308.61,618) v1@290.5,618 ; v1@492.7,632.7 ccw(c479.89,619.89) 479.89,638 ccw(c479.89,656.11) v1@492.7,643.3
SDAISO: R14.1 U1.3 U3.15 U5.7 | length 1989.8
  Top Layer w15: U5.7 v1@829,638 ; v1@822.93,630.93 ccw(c805.86,613.86) 805.86,638 ccw(c805.86,662.14) v1@822.93,645.07 ; v1@984.93,579.07 ccw(c970.27,593.73) 991,593.73 ; R14.1@985.17,608.2 cw(c971.09,594.12) 991,594.12 cw(c1010.91,594.12) R14.1@996.83,608.2 ; v1@991,571 R14.1@991,615 ; R14.1@991,598.56 ccw(c1018.56,598.56) v1@999.07,579.07 ; v1@992,562 cw(c992,537.86) 1009.07,554.93 cw(c1026.14,572) v1@1002,572 ; v1(992,572) 1021.07,542.93 1189.07,542.93 1207.59,524.41 U3.15@1207.59,487.56 ; U1.3 1871.18,639.82 1882,629 1883,629 1883,620 1884,621 v1(1884,626)
  Bottom Layer w15: v1(830,638) 992,638 ; v1@837.07,630.93 cw(c854.14,613.86) 854.14,638 cw(c854.14,662.14) v1@837.07,645.07 ; v1@984.93,579.07 ccw(c967.86,596.14) 992,596.14 ccw(c1016.14,596.14) v1@999.07,579.07 ; v1@989,575 988,575 992,579 992,638 ; v1@1876.93,633.07 ccw(c1859.86,650.14) 1884,650.14 ccw(c1908.14,650.14) v1@1891.07,633.07 ; v1@1884,621 v1(1884,626) 1884,692 1831,745 1160,745 1053,638 992,638
YX-1: J1.5 R2.1 | length 430.5
  Top Layer w15: R2.1@2192,548 2250,548 2304,602 2429,602 J1.5@2453,578 ; R2.1@2210.8,542.17 cw(c2224.88,528.09) 2224.88,548 cw(c2224.88,567.91) R2.1@2210.8,553.83 ; 2388.15,602 cw(c2388.15,531.15) J1.5@2438.25,581.25 ; 2392.98,602 ccw(c2392.98,666.02) J1.5@2438.25,620.75
pads on no net: U3.1 U3.2 U3.3 U3.7 U4.3 U4.4 U4.5 U4.11 U4.12 U4.14 U6.

## Polygon pours and split planes (outlines as drawn)
DGNDISO on Bottom Layer "GND_ISO" (hatched 90Degree grid 0 track 4, pour order 1001): 821,770 738,770 738,678 738,30 756,30 2585,30 2585,120 2585,770 2490,770 821,770
GND on Bottom Layer "GND" (hatched 90Degree grid 0 track 4, pour order 1000): 29,661 29,770 113,770 594,770 594,670 594,30 432,30 29,30 29,661

## Keep-outs
Keep-Out Layer:
  lines w12: 0,0 2615,0 2615,800 0,800 0,0

## Silkscreen, mask and mechanical layers (free items; w line width, h text height)
Top Overlay:
  lines w10: 357,566 376,585.5
  text "5" at 2443,680 h40
  text "IMOD" at 85,670 h40
  text "1" at 2453,85 h40
Bottom Overlay:
  text "EVAL-CN0349-PMDZ" at 1885,188 h120
  text "Rev 0" at 1758,95 h120
Mechanical 1:
  lines w12: 30,30 2585,30 2585,770 30,770 30,30

## Dimensions
0,800 to 2615,800 on Mechanical 1
0,800 to 0,0 on Mechanical 1

## Text inside footprints (layer, text, board x,y; h text height)
J2: Top Overlay "1" at 69,179 h40 r270; Top Overlay "2" at 171,180 h40 r270; Top Overlay "7" at 64,645 h40 r270; Top Overlay "8" at 205,620 h40 r90
?: Bottom Overlay "t" at 416,220 h40 r300; Bottom Overlay "n" at 430,188 h40 r310; Bottom Overlay "a" at 452,156 h40 r310; Bottom Overlay "i" at 476,138 h40 r340; Bottom Overlay "l" at 495,130 h40 r355; Bottom Overlay "p" at 533,137 h40; Bottom Overlay "m" at 593,157 h40 r30; Bottom Overlay "o" at 623,192 h40 r60; Bottom Overlay "C" at 645,225 h40 r60; Bottom Overlay "R" at 583,283 h45 r315; Bottom Overlay "o" at 555,307 h45 r340; Bottom Overlay "H" at 483,351 h45 r190; Bottom Overlay "S" at 434,320 h45 r210
?: Bottom Overlay "DEVICES" at 1575,498 h81; Bottom Overlay "ANALOG" at 1577,606 h80